# Altium PCB PCB1.PcbDoc
Units mil, origin at the board's own origin, x right, y up, seen from the top; angles counter-clockwise.
Board outline 6000 x 4000 mil, 2 copper layers (Top Layer, Bottom Layer); 15 components, 0 nets, 85 pads, 0 vias.
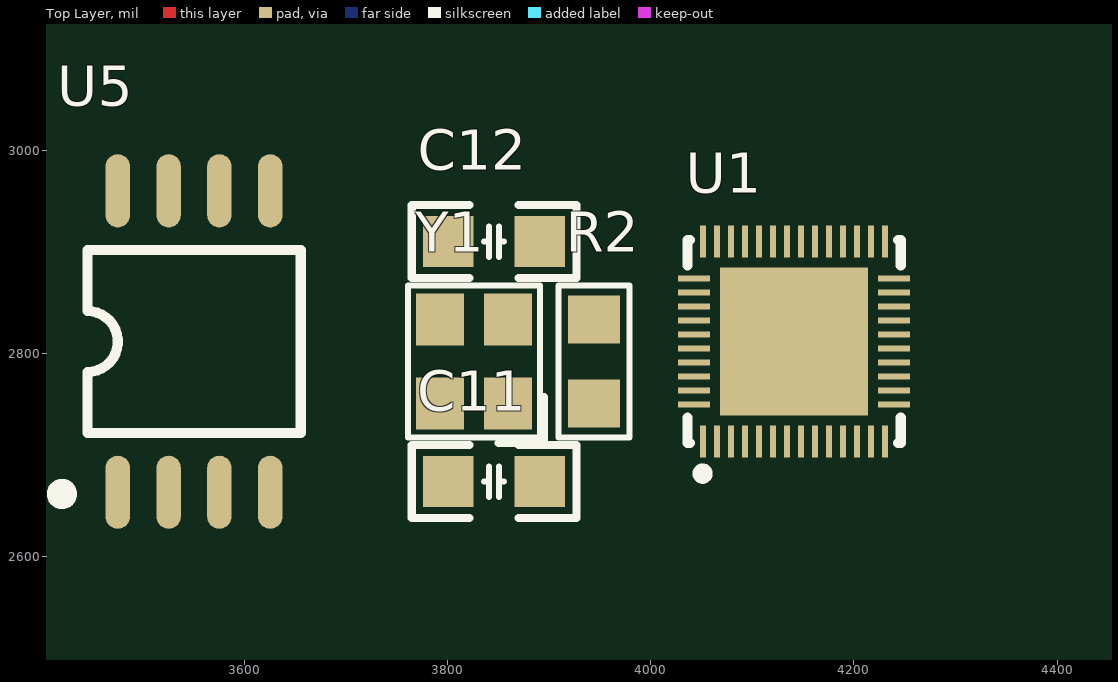
[diagram p0: Top Layer view]
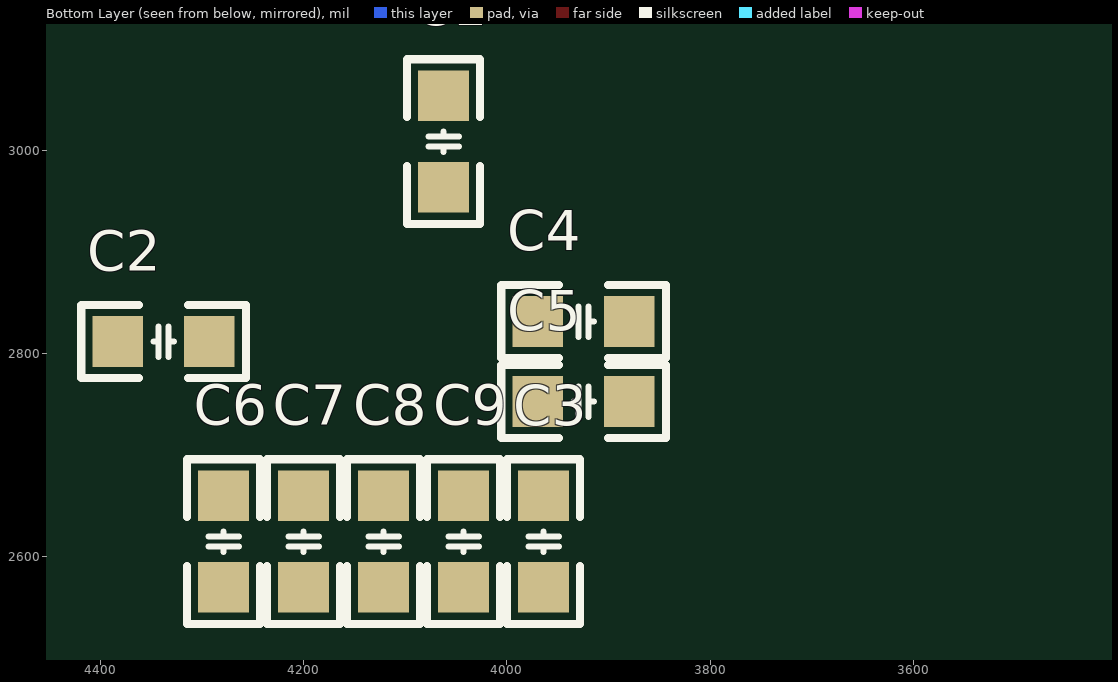
[diagram p1: Bottom Layer view, seen from below]

## Layer stack, top to bottom
Top Solder: solder mask 0.4, Solder Resist, Dk 3.5
Top Layer: signal copper 1.4
Dielectric 1: dielectric 12.6, FR-4, Dk 4.8
Bottom Layer: signal copper 1.4
Bottom Solder: solder mask 0.4, Solder Resist, Dk 3.5

## Board outline
1000,1000 7000,1000 7000,5000 1000,5000

## Design rules (kind name [scope] priority, off if disabled: settings)
Clearance [All] p1: gap=10 ignorepadtopadclearanceinfootprint=FALSE except(0: Arc-Hole Track-Hole SMDPad-Hole THPad-Hole Via-Hole Fill-Hole Poly-Hole Region-Hole Text-Hole)
PolygonConnect [All] p1: connectstyle=Relief reliefconductorwidth=10 reliefentries=4 polygonreliefangle="90 Angle" airgapwidth=10
RoutingVias [All] p1: holewidth=28 width=50 viastyle="Through Hole" minholewidth=28 minwidth=50 maxholewidth=28 maxwidth=50
SolderMaskExpansion [All] p1: expansion=4
Width [All] p1: maxlimit=10 minlimit=10 preferedwidth=10
30 further rules are at their usual default settings.

## Components (designator, comment, footprint, x,y, rotation, side; value= is the part's Value field where it differs from the comment)
C1 "0.1uF" C0805_M 4062.4,3008.74 r90 bottom
C2 "0.1uF" C0805_M 4337.99,2811.89 r0 bottom
C3 "0.1uF" C0805_M 3963.98,2615.04 r90 bottom
C4 "1uF" C0805_M 3924.61,2831.57 r180 bottom
C5 "100pF" C0805_M 3924.61,2752.83 r180 bottom
C6 "10uF" C0805_M 4278.94,2615.04 r270 bottom
C7 "10uF" C0805_M 4200.2,2615.04 r270 bottom
C8 "1uF" C0805_M 4121.46,2615.04 r270 bottom
C9 "0.1uF" C0805_M 4042.72,2615.04 r270 bottom
C11 "15pF" C0805_M 3845.87,2674.09 r180 top
C12 "15pF" C0805_M 3845.87,2910.31 r180 top
R2 "1M" R0805_M 3944.29,2792.2 r90 top value=1K
U1 "ESP32-D0WDQ6" QFN-48_L5.0-W5.0-P0.35-BL-EP3.7 4141.14,2811.89 r0 top
U5 "W25Q32FVSS" SOIC-8W 3550.59,2811.89 r90 top
Y1 "40MHz" OSC-3225-4P 3826.18,2792.2 r90 top

## Footprints (in the part's own frame and the unit in brackets; to place one, negate y for a bottom-side part, rotate by r counter-clockwise, add the part's x,y. Pads: shape width x height; smd on the part's side, far side on the other; paste and mask are expansions set on the pad)
C0805_M [mil] "贴片MLCC电容"
  rect 50x50 smd: 1(-45,0) 2(45,0)
  silkscreen extent -81,-36 81,36, body extent -39,-25 39,25, height 49
OSC-3225-4P [mm] "3.2*2.5*0.7mm(长宽高)                             淘宝ID:黄晶宝石"
  rect 1.3x1.2 smd: 1(-1.05,-0.85) 2(1.05,-0.85) 3(1.05,0.85) 4(-1.05,0.85)
  silkscreen extent -2.03,-1.75 1.91,1.65, body extent -1.6,-1.25 1.6,1.25, height 0.7
QFN-48_L5.0-W5.0-P0.35-BL-EP3.7 [mm] "ESP32-D0WD"
  rect 0.15x0.8 smd paste-100 mask+0.05: 1(-2.275,-2.5) 2(-1.925,-2.5) 3(-1.575,-2.5) 4(-1.225,-2.5) 5(-0.875,-2.5) 6(-0.525,-2.5) 7(-0.175,-2.5) 8(0.175,-2.5) 9(0.525,-2.5) 10(0.875,-2.5) 11(1.225,-2.5) 12(1.575,-2.5) 13(1.925,-2.5) 14(2.275,-2.5) 25(2.275,2.5) 26(1.925,2.5) 27(1.575,2.5) 28(1.225,2.5) 29(0.875,2.5) 30(0.525,2.5) 31(0.175,2.5) 32(-0.175,2.5) 33(-0.525,2.5) 34(-0.875,2.5) 35(-1.225,2.5) 36(-1.575,2.5) 37(-1.925,2.5) 38(-2.275,2.5)
  rect 0.8x0.15 smd paste-100 mask+0.05: 15(2.5,-1.575) 16(2.5,-1.225) 17(2.5,-0.875) 18(2.5,-0.525) 19(2.5,-0.175) 20(2.5,0.175) 21(2.5,0.525) 22(2.5,0.875) 23(2.5,1.225) 24(2.5,1.575) 39(-2.5,1.575) 40(-2.5,1.225) 41(-2.5,0.875) 42(-2.5,0.525) 43(-2.5,0.175) 44(-2.5,-0.175) 45(-2.5,-0.525) 46(-2.5,-0.875) 47(-2.5,-1.225) 48(-2.5,-1.575)
  rect 3.7x3.7 smd paste-100 mask+0.05: 49(0,0)
  silkscreen extent -2.67,-3.43 2.67,2.54
R0805_M [mm] "1/8W贴片电阻"
  rect 1.2x1.3 smd: 1(-1.05,0) 2(1.05,0)
  silkscreen extent -1.9,-0.89 1.9,0.89, body extent -1,-0.62 1,0.63, height 0.6
SOIC-8W [mil] "25Q128 SPI_FLASH  SOIC8"
  oval 72x24 smd: 1(-148.35,75) 2(-148.35,25) 3(-148.35,-25) 4(-148.35,-75) 5(148.35,-75) 6(148.35,-25) 7(148.35,25) 8(148.35,75)
  silkscreen extent -155,-105 90,135, body extent -155,-104 155,104, height 75

## Part data
C1 C2 C3 C4 C5 C6 C7 C8 C9 C11 C12: library part CAP, "Capacitor"
R2: library part Res2, "Resistor", LatestRevisionDate=17-Jul-2002, LatestRevisionNote="Re-released for DXP Platform.", PackageDescription="Axial Device, Thru-Hole; 2 Leads; 0.4 in Pin Spacing", PackageReference=AXIAL-0.4, Published=8-Jun-2000, Publisher="Altium Limited"
Y1: library part XTAL-4, "CL=15pF", LatestRevisionDate=17-Jul-2002, LatestRevisionNote="Re-released for DXP Platform.", PackageDescription="Crystal, Thru-Hole; 2 Leads; Body 3.1 x 8.2 mm (Dia.xH)", PackageReference=R38, Published=8-Jun-2000, Publisher="Altium Limited"

## Nets (pads, with @x,y where several pads share a name; then routed paths per layer and width w, separated by ;. In a path a pad name is that pad's centre, name@x,y a point inside that pad or via, vN(x,y) a via of type N, cw(c..) or ccw(c..) an arc to the next point about the centre after c; other vN are vias at no path point)
pads on no net: C1.1 C1.2 C2.1 C2.2 C3.1 C3.2 C4.1 C4.2 C5.1 C5.2 C6.1 C6.2 C7.1 C7.2 C8.1 C8.2 C9.1 C9.2 C11.1 C11.2 C12.1 C12.2 R2.1 R2.2 U1.1 U1.2 U1.3 U1.4 U1.5 U1.6 U1.7 U1.8 U1.9 U1.10 U1.11 U1.12 U1.13 U1.14 U1.15 U1.16 U1.17 U1.18 U1.19 U1.20 U1.21 U1.22 U1.23 U1.24 U1.25 U1.26 U1.27 U1.28 U1.29 U1.30 U1.31 U1.32 U1.33 U1.34 U1.35 U1.36 U1.37 U1.38 U1.39 U1.40 U1.41 U1.42 U1.43 U1.44 U1.45 U1.46 U1.47 U1.48 U1.49 U5.1 U5.2 U5.3 U5.4 U5.5 U5.6 U5.7 U5.8 Y1.1 Y1.2 Y1.3 Y1.4